# EAGLE board or-clock_interconnect (EAGLE 6.5.0)
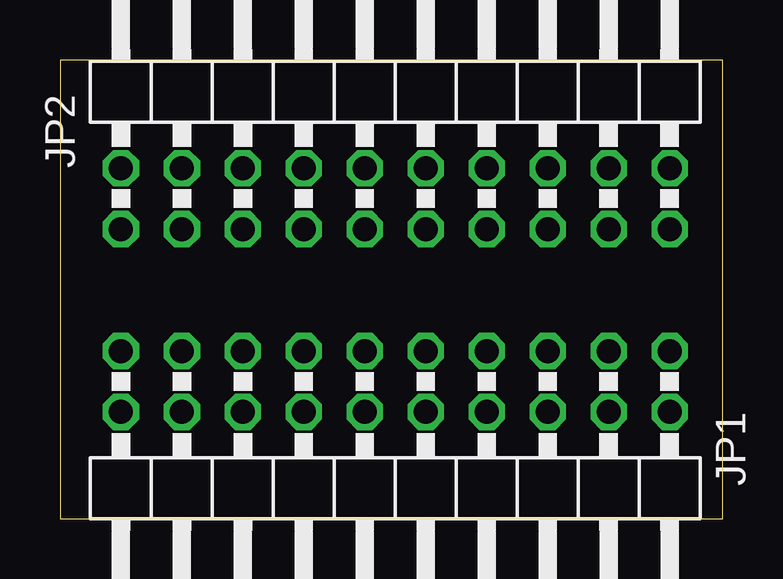
[diagram p0: board, top side]
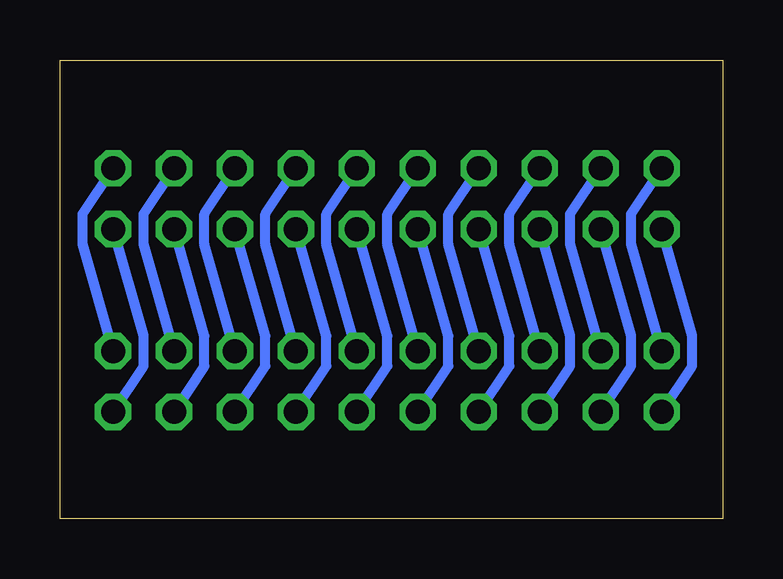
[diagram p1: board, bottom side, seen from below]

Size 27.61 x 19.11 mm. Coordinates in mm from the lower left corner, seen from the top.
Outline: 0,0 27.61,0 27.61,19.11 0,19.11 0,0
Copper layers (1*16): Top 0.035mm / dielectric 1.5mm / Bottom 0.035mm
Design rules "default": minimum track width 10mil, minimum drill 24mil, track to track 8mil, track to pad 8mil, pad to pad 8mil, via to via 8mil, smd to smd 8mil, copper to edge 40mil, drill to drill 8mil, minimum pad ring 10mil, minimum via ring 8mil, stop-mask expansion 4mil, vias tented up to drill 0mil, thermal gap 10mil

## Footprints (pad centres in the part's own frame; a part is rotated, then mirrored left to right if it is on the bottom)
2X10/90 = drill 1 octagon: 1 -11.43,-6.35; 2 -11.43,-3.81; 3 -8.89,-6.35; 4 -8.89,-3.81; 5 -6.35,-6.35; 6 -6.35,-3.81; 7 -3.81,-6.35; 8 -3.81,-3.81; 9 -1.27,-6.35; 10 -1.27,-3.81; 11 1.27,-6.35; 12 1.27,-3.81; 13 3.81,-6.35; 14 3.81,-3.81; 15 6.35,-6.35; 16 6.35,-3.81; 17 8.89,-6.35; 18 8.89,-3.81; 19 11.43,-6.35; 20 11.43,-3.81

## Placement (x,y rotation side)
JP1  [2X10/90]  13.97,0.64 180 top
JP2  [2X10/90]  13.97,18.41 0 top

## Library data of the parts
JP1 JP2 = nixkit_parts

## Nets
1: JP1.1 JP2.20
2: JP1.2 JP2.19
3: JP1.3 JP2.18
4: JP1.4 JP2.17
5: JP1.5 JP2.16
6: JP1.6 JP2.15
7: JP1.7 JP2.14
8: JP1.8 JP2.13
9: JP1.9 JP2.12
10: JP1.10 JP2.11
11: JP1.11 JP2.10
12: JP1.12 JP2.9
13: JP1.13 JP2.8
14: JP1.14 JP2.7
15: JP1.15 JP2.6
16: JP1.16 JP2.5
17: JP1.17 JP2.4
18: JP1.18 JP2.3
19: JP1.19 JP2.2
20: JP1.20 JP2.1

## Tracks (layer width: path | path; a pad name or v marks a point on that pad's centre or on a via)
1
  Bottom 0.406: JP1.1 26.67,11.43 26.67,12.7 JP2.20
2
  Bottom 0.406: JP1.2 24.13,6.35 24.13,7.62 JP2.19
3
  Bottom 0.406: JP1.3 24.13,11.43 24.13,12.7 JP2.18
4
  Bottom 0.406: JP1.4 21.59,6.35 21.59,7.62 JP2.17
5
  Bottom 0.406: JP1.5 21.59,11.43 21.59,12.7 JP2.16
6
  Bottom 0.406: JP1.6 19.05,6.35 19.05,7.62 JP2.15
7
  Bottom 0.406: JP1.7 19.05,11.43 19.05,12.7 JP2.14
8
  Bottom 0.406: JP1.8 16.51,6.35 16.51,7.62 JP2.13
9
  Bottom 0.406: JP1.9 16.51,11.43 16.51,12.7 JP2.12
10
  Bottom 0.406: JP1.10 13.97,6.35 13.97,7.62 JP2.11
11
  Bottom 0.406: JP1.11 13.97,11.43 13.97,12.7 JP2.10
12
  Bottom 0.406: JP1.12 11.43,6.35 11.43,7.62 JP2.9
13
  Bottom 0.406: JP1.13 11.43,11.43 11.43,12.7 JP2.8
14
  Bottom 0.406: JP1.14 8.89,6.35 8.89,7.62 JP2.7
15
  Bottom 0.406: JP1.15 8.89,11.43 8.89,12.7 JP2.6
16
  Bottom 0.406: JP1.16 6.35,6.35 6.35,7.62 JP2.5
17
  Bottom 0.406: JP1.17 6.35,11.43 6.35,12.7 JP2.4
18
  Bottom 0.406: JP1.18 3.81,6.35 3.81,7.62 JP2.3
19
  Bottom 0.406: JP1.19 3.81,11.43 3.81,12.7 JP2.2
20
  Bottom 0.406: JP1.20 1.27,6.35 1.27,7.62 JP2.1